# Altium PCB RiskChemi_Sensors.PcbDoc
Units mil, origin at the board's own origin, x right, y up, seen from the top; angles counter-clockwise.
Board outline 6000 x 4000 mil, 2 copper layers (Top Layer, Bottom Layer); 90 components, 57 nets, 307 pads, 573 vias.
Unrouted connection lines stored in the file: 3.
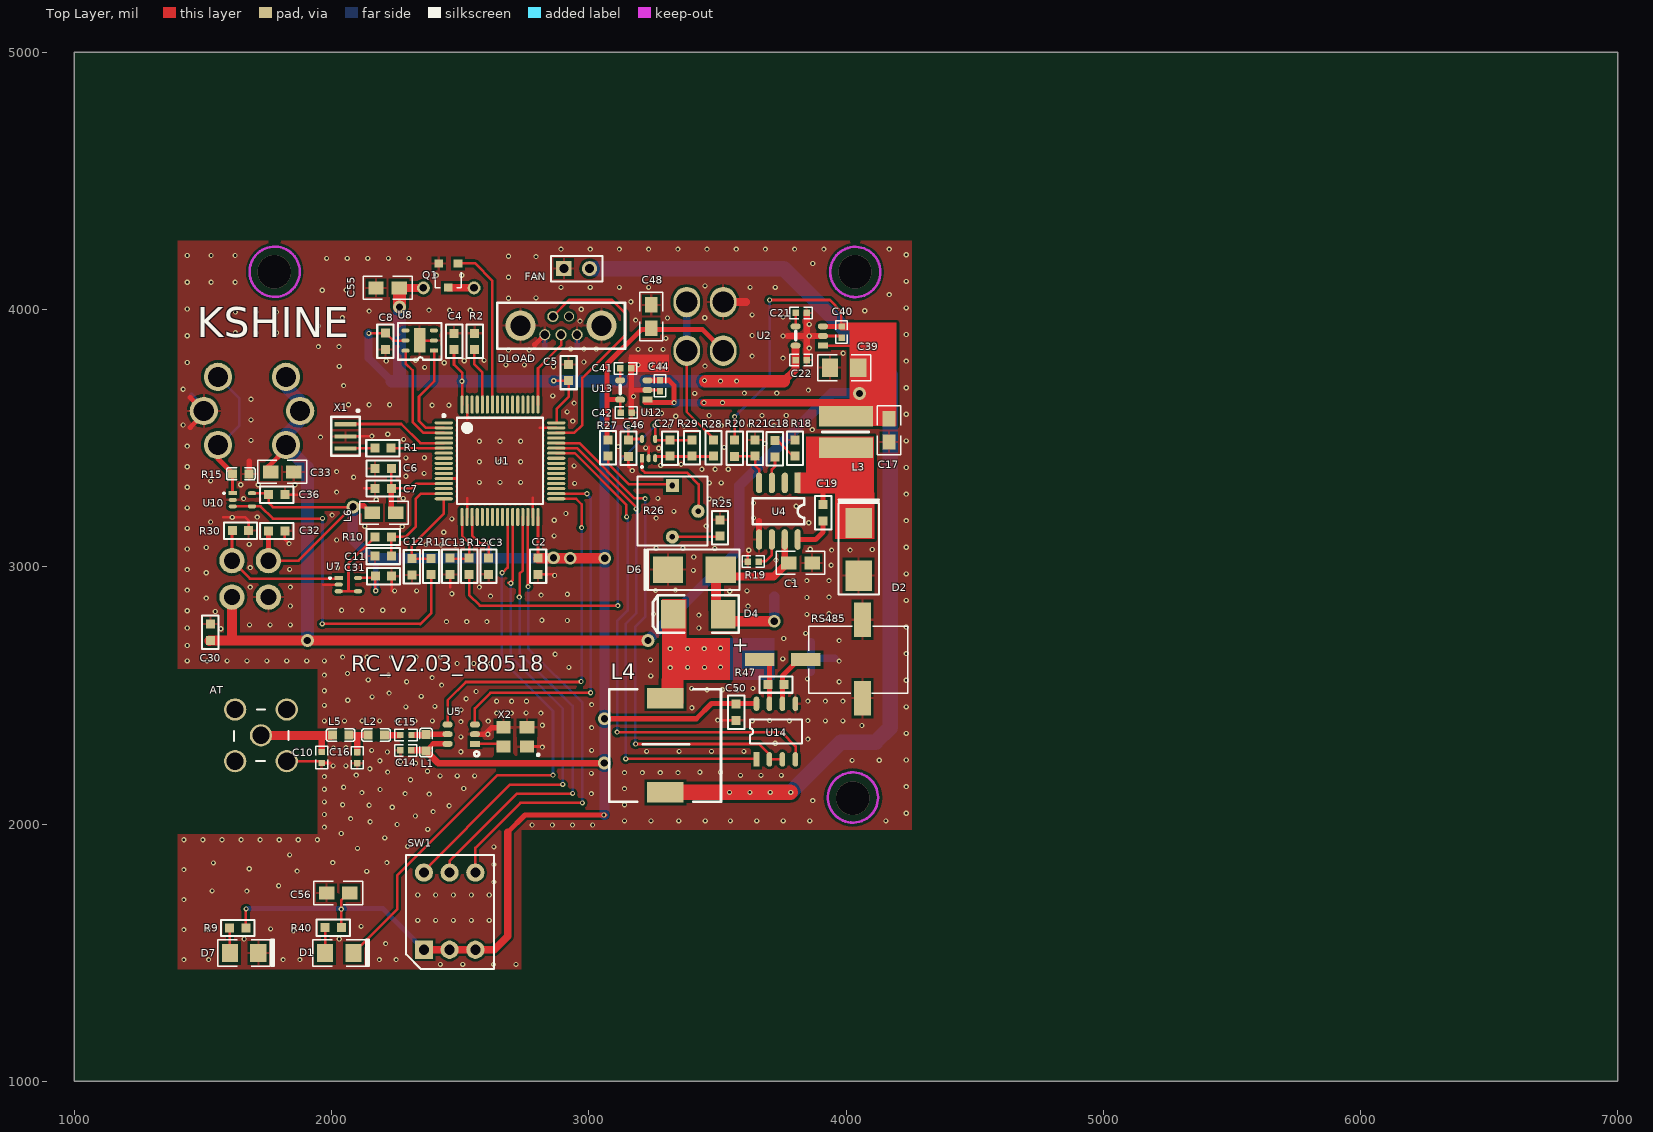
[diagram p0: Top Layer view]
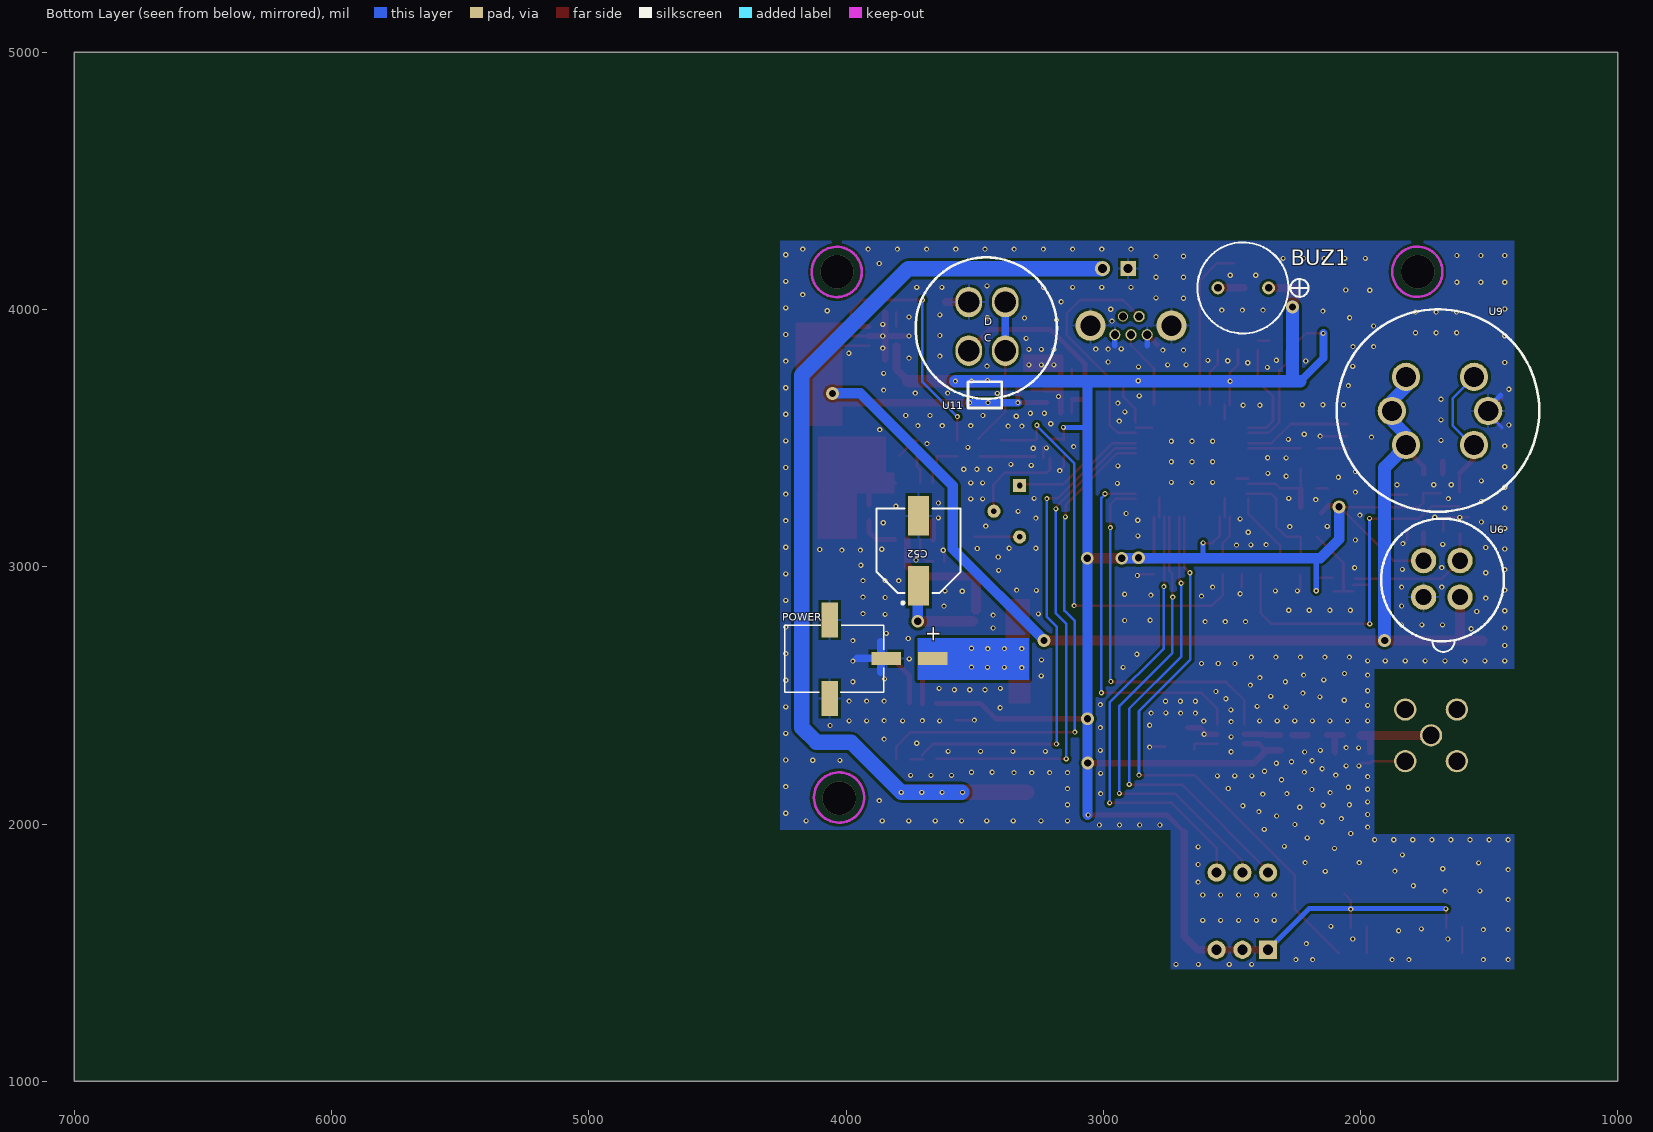
[diagram p1: Bottom Layer view, seen from below]

## Layer stack, top to bottom
Top Solder: solder mask 0.4, Solder Resist, Dk 3.5
Top Layer: signal copper 1.4
Dielectric 1: dielectric 12.6, FR-4, Dk 4.8
Bottom Layer: signal copper 1.4
Bottom Solder: solder mask 0.4, Solder Resist, Dk 3.5

## Board outline
1000,1000 7000,1000 7000,5000 1000,5000

## Design rules (kind name [scope] priority, off if disabled: settings)
Clearance Clearance_5 [InNamedPolygon('GND_L02_P-001')] p1: gap=10
Clearance Clearance_4 [InNamedPolygon('GND_L02_P-001')] p2: gap=10
Clearance Clearance_3 [InNamedPolygon('GND_L02_P-001')] p3: gap=10
Clearance Clearance_2 [InNamedPolygon('Top Layer-DGND')] p4: gap=10
Clearance Clearance_1 [InNamedPolygon('GND_L02_P-001')] p5: gap=10
Clearance [All] p6: gap=3
ComponentClearance [All] p1: gap=0 collisioncheckmode=3 verticalgap=0 showdistances=FALSE
PolygonConnect PolygonConnect_1 [IsVia] p1: connectstyle=Direct reliefconductorwidth=10 reliefentries=2 polygonreliefangle="90 Angle" airgapwidth=10
PolygonConnect [All] p2: connectstyle=Relief reliefconductorwidth=10 reliefentries=4 polygonreliefangle="90 Angle" airgapwidth=10
RoutingVias [All] p1: holewidth=28 width=50 viastyle="Through Hole" minholewidth=28 minwidth=50 maxholewidth=28 maxwidth=50
SilkToSilkClearance [All] p1 off: silktosilkclearance=10
SilkToSolderMaskClearance [IsPad] p1 off: minsilkscreentomaskgap=10 clearancetoexposedcopper=TRUE
SolderMaskExpansion [All] p1: expansion=4
Width [All] p1: maxlimit=100 minlimit=10 preferedwidth=10
27 further rules are at their usual default settings.

## Components (designator, comment, footprint, x,y, rotation, side; value= is the part's Value field where it differs from the comment)
AT "SMA" SMA 1826,2445 r270 top
BUZ1 "BUZZER" BUZ0905 2455,4084 r180 bottom
C1 "10uF" 0805 3778,3015 r0 top
C2 "100nF" 0603 2799,3063 r0 top
C3 "100nF" 0603 2606,3063 r0 top
C4 "100nF" 0603 2481,3815 r180 top
C5 "100nF" 0603 2926,3694 r180 top
C6 "100nF" 0603 2262,3386 r270 top
C7 "1uF" 0603 2262,3309 r270 top
C8 "100nF" 0603 2205,3938 r0 top
C10 "NULL" 0402 1958,2365 r0 top
C11 "100nF" 0603 2140,3037 r90 top
C12 "100nF" 0603 2308,3061 r0 top
C13 "100nF" 0603 2457,3063 r0 top
C14 "100nF" 0402 2395,2290 r270 top
C15 "82pF" 0402 2183,2342 r90 top
C16 "3.9pF" 0402 2096,2364 r0 top
C17 "22uF" 0805 4167,3575 r270 top
C18 "150pF" 0603 3719,3520 r0 top
C19 "100nF" 0603 3907,3271 r0 top
C21 "NULL" 0402 3719,3983 r90 top
C22 "1uF" 0402 3719,3799 r90 top
C27 "1uF" 0603 3320,3399.95 r180 top
C30 "1uF" 0603 1533,2684 r180 top
C31 "100nF" 0603 2141,2959 r90 top
C32 "100nF" 0603 1726,3135 r90 top
C33 "10uF" 0805 1763,3369 r0 top
C36 "100nF" 0603 1726,3276 r90 top
C39 "22uF" 1206 4048,3774 r180 top
C40 "100nF" 0402 3979,4019 r0 top
C41 "22nF" 0402 3037,3767 r90 top
C42 "1uF" 0402 3039,3595 r90 top
C44 "100nF" 0402 3273,3810 r0 top
C46 "100nF" 0603 3150,3522 r0 top
C48 "10uF" 0805 3243,3928 r90 top
C50 "100nF" 0603 3569,2496 r0 top
C52 "47uF" cap_pol_8*10.2 3718,3062 r90 bottom
C55 "10uF" 0805 2263,4084 r180 top
C56 "10uF" 0805 2071,1732 r180 top
D1 "LED_STATUS" 1206_LED 2028,1502 r0 top
D2 "B290-13-F" B290 4049,3170 r270 top
D4 "1N4007" 6032_pol 3428,2814 r180 top
D6 "SMAJ36CA" B290 3308,2989 r0 top
D7 "LED_POWER" 1206_LED 1658,1502 r0 top
DLOAD "USB Connector" Mini_USB 2892,3902 r90 top
FAN "Header 2" HDR1X2 2903,4159 r0 top
L1 "100nH" 0603C 2368,2318 r0 top
L2 "8.2nH" 0603C 2175,2345 r270 top
L3 "15uH" "4*4 Inductor" 3992,3524 r180 top
L4 "22uH" 10*10Inductor 3298,2123 r0 top
L5 "0R" 0603C 2037,2345 r270 top
L6 "10uH" 0805 2249,3210 r180 top
POWER "Header 3" KR_1X2H 4083,2650 r90 bottom
Q1 "2N7002" 2N7002 2456,4133 r180 top
R1 "100R" 0603 2261,3465 r270 top
R2 "10K" 0603 2561,3815 r180 top
R9 "510R" 0603 1697,1600 r270 top
R10 "1M" 0603 2262,3120 r270 top
R11 "1M" 0603 2383,3062 r0 top
R12 "1M" 0603 2531,3063 r0 top
R15 "Res1" 0603C 1646,3362 r90 top
R18 "100k" 0603 3806,3400 r180 top
R19 "200K" 0402 3746,3024 r270 top
R20 "210K" 0603 3563,3522 r0 top
R21 "40.2K" 0603 3650,3400 r180 top
R25 "5K" 0603 3514,3090 r180 top
R26 "3362P" res_adj 3325,3316 r0 top
R27 "5K" 0603 3071,3523 r0 top
R28 "1K" 0603 3489,3401 r180 top
R29 "100K" 0603 3397,3523 r0 top
R30 "10K" 0603 1585,3136 r90 top
R40 "510" 0603 2068,1601 r270 top
R47 "120" 0603 3789,2546 r270 top
RS485 "Header 3" KR_1X2H 4084,2632 r270 top
SW1 "HRO韩国韩荣拨码开关" SW_6P_HRO 2359,1511 r90 top
U1 "STM32F103R8T6" LQFP64_N 2655,3412 r0 top
U2 "RT9013-33GB" SOT-23-5 3863,3899 r90 top
U4 "MP2565DN" so-8 3812,3326 r270 top
U5 "CMT2119A" SOT23-6 2510,2351 r90 top
U6 "TGS2602" "Gas Sensor TGS2602 Slot" 1613,2882 r0 bottom
U7 "LMV321SQ3T2G" SC-70-5 2028,2956 r0 top
U8 "SHT20" SHT20 2398,3840 r180 top
U9 "Gas Sensor" "Gas Sensor 2M010 Slot" 1823,3738 r180 bottom
U10 "LMV321SQ3T2G" SC-70-5 1616,3286 r0 top
U11 "WS101" Gas_Sensor_WS101_Slot 3452.45,3921 r180 bottom
U12 "LMV321SQ3T2G" SC-70-5 3207,3422 r90 top
U13 "RT9193-30" SOT-23-5 3181,3689 r90 top
U14 "SP3485" SO-8N 3652,2251 r90 top
X1 "8M smd" 8Mhz_XTAL 2054,3554 r270 top
X2 "XTAL_Negative" XTAL3225 2669,2376 r0 top

## Footprints (in the part's own frame and the unit in brackets; to place one, negate y for a bottom-side part, rotate by r counter-clockwise, add the part's x,y. Pads: shape width x height; smd on the part's side, far side on the other; paste and mask are expansions set on the pad)
2N7002 [mm]
  rect 0.85x0.8 smd: 1(0.047,1.221) 2(-0.903,-1.179) 3(0.997,-1.179)
  silkscreen extent -1.23,-0.28 1.32,1.22
"4*4 Inductor" [mm]
  rect 5.3x2 smd: 1(-0.203,-1.548) 2(-0.203,1.552)
  silkscreen extent -2.46,0 2.13,0
8Mhz_XTAL [mm]
  rect 0.4x2.2 smd: 1(0,0) 2(1.2,0) 3(2.4,0)
  silkscreen extent -1.45,-1.39 3.13,1.4
10*10Inductor [mm]
  rect 3.6x2 smd: 1(0,0) 2(0,9.3)
  silkscreen extent -5.55,-0.92 5.49,10.19
0402 [mil]
  rect 25x25 smd: 1(3.98,-127.99) 2(3.98,-84.98)
  silkscreen extent -19,-150 26,-63
0603 [mil]
  rect 35x35 smd: 1(4.25,-92.76) 2(4.25,-29.76)
  silkscreen extent -27,-126 36,4
0603C [mil]
  rect 35x35 smd: 1(-0.83,30.88) 2(-0.83,-34.12)
  silkscreen extent -24,-57 23,54
0805 [mil]
  rect 60x50 smd: 1(90,0) 2(0,0)
  silkscreen extent -50,-45 140,45
1206 [mm]
  rect 1.6x1.8 smd: 1(0,0) 2(2.8,0)
  silkscreen extent -1.2,-1.3 4,1.3
1206_LED [mm]
  rect 1.6x1.8 smd: 1(-1.344,-0.081) 2(1.456,-0.081)
  silkscreen extent -2.54,-1.38 2.98,1.22
6032_pol [mm]
  rect 2.4x2.8 smd: 1(2.538,-0.041) 2(-2.422,-0.041)
  silkscreen extent -3.95,-1.89 4.53,1.81
B290 [mm]
  rect 3x2.6 smd: 1(5.2,0) 2(0,0)
  silkscreen extent -2.34,-2 7.06,2
BUZ0905 [mm] "Buzzer"
  round 1.27 hole 0.75: 1(2.485,0.002) 2(-2.515,0.002)
  silkscreen extent -4.55,-4.5 6.43,4.5
cap_pol_8*10.2 [mm]
  rect 3.9x2.05 smd: 1(-3.443,-0.001) 2(3.457,-0.001)
  silkscreen extent -5.27,-4.15 4.16,4.15
"Gas Sensor 2M010 Slot" [mm]
  round 2.8 hole 2: 1(0,0) 2(-1.391,-3.36) 3(0,-6.719) 4(6.719,-6.719) 5(8.109,-3.36) 6(6.719,0)
  silkscreen extent -6.84,-13.32 13.16,6.68
"Gas Sensor TGS2602 Slot" [mm]
  round 2.5 hole 1.6: 1(0,0) 2(0,-3.6) 3(3.6,-3.6) 4(3.6,0)
  silkscreen extent -4.33,-7.76 7.8,5.42
Gas_Sensor_WS101_Slot [mm]
  oval 2.6x3 hole 2.1: 1(-1.783,2.742) 2(-1.783,-2.058) 3(1.817,-2.058) 4(1.817,2.742)
  silkscreen extent -7.04,-7.72 6.93,7.16
HDR1X2 [mm] "Connector; Header; 2 Position"
  rect 1.5x1.5 hole 0.9: 1(0,0)
  round 1.5 hole 0.9: 2(2.54,0)
  silkscreen extent -1.27,-1.27 3.81,1.27
KR_1X2H [mm]
  rect 1.27x2.92 smd: 1(-0.181,-10.66) 2(-0.181,-6.088)
  rect 3.43x1.65 smd: 3(-4.118,-0.5) 3(3.629,-0.5)
  silkscreen extent -3.48,-5.83 3.12,3.95
LQFP64_N [mm] "Thin QFP, 64-Leads, Body 10x10mm, Pitch 0.5mm, IPC Medium Density"
  oval 1.8x0.3 smd: 1(-5.55,3.75) 2(-5.55,3.25) 3(-5.55,2.75) 4(-5.55,2.25) 5(-5.55,1.75) 6(-5.55,1.25) 7(-5.55,0.75) 8(-5.55,0.25) 9(-5.55,-0.25) 10(-5.55,-0.75) 11(-5.55,-1.25) 12(-5.55,-1.75) 13(-5.55,-2.25) 14(-5.55,-2.75) 15(-5.55,-3.25) 16(-5.55,-3.75) 33(5.55,-3.75) 34(5.55,-3.25) 35(5.55,-2.75) 36(5.55,-2.25) 37(5.55,-1.75) 38(5.55,-1.25) 39(5.55,-0.75) 40(5.55,-0.25) 41(5.55,0.25) 42(5.55,0.75) 43(5.55,1.25) 44(5.55,1.75) 45(5.55,2.25) 46(5.55,2.75) 47(5.55,3.25) 48(5.55,3.75)
  oval 0.3x1.8 smd: 17(-3.75,-5.55) 18(-3.25,-5.55) 19(-2.75,-5.55) 20(-2.25,-5.55) 21(-1.75,-5.55) 22(-1.25,-5.55) 23(-0.75,-5.55) 24(-0.25,-5.55) 25(0.25,-5.55) 26(0.75,-5.55) 27(1.25,-5.55) 28(1.75,-5.55) 29(2.25,-5.55) 30(2.75,-5.55) 31(3.25,-5.55) 32(3.75,-5.55) 49(3.75,5.55) 50(3.25,5.55) 51(2.75,5.55) 52(2.25,5.55) 53(1.75,5.55) 54(1.25,5.55) 55(0.75,5.55) 56(0.25,5.55) 57(-0.25,5.55) 58(-0.75,5.55) 59(-1.25,5.55) 60(-1.75,5.55) 61(-2.25,5.55) 62(-2.75,5.55) 63(-3.25,5.55) 64(-3.75,5.55)
  silkscreen extent -5.67,-4.25 4.25,4.57, body extent -5,-5 5,5, height 1.6
Mini_USB [mm] "180 degree"
  round 1.1 hole 0.8: 1(0,-1.6) 3(0,0) 4(1.8,0.8) 5(0,1.6)
  round 1 hole 0.8: 2(1.8,-0.8)
  round 3 hole 2: 6(0.9,4) 7(0.9,-4)
  silkscreen extent -1.39,-6.32 3.15,6.3
res_adj [mm]
  rect 1.3x1.3 hole 0.55: 1(0,0)
  round 1.3 hole 0.55: 2(2.54,-2.54) 3(0,-5.08)
  silkscreen extent -3.44,-5.95 3.45,0.9
SC-70-5 [mm]
  rect 0.8x0.4 smd: 1(0,0)
  oval 0.8x0.4 smd: 2(0,-0.65) 3(0,-1.3) 4(1.9,-1.3) 5(1.9,0)
  silkscreen extent -0.91,-0.05 -0.81,0.05
SHT20 [mm]
  rect 0.8x0.4 smd: 1(0,0)
  oval 0.8x0.4 smd: 2(0,-1) 3(0,-2) 4(2.8,-2) 5(2.8,-1) 6(2.8,0)
  rect 1.1x2.4 smd: 2(1.402,-1.019)
  silkscreen extent -0.75,-2.72 3.53,0.89
SMA [mm]
  round 2.2 hole 1.7: 1(2.55,-2.55) 2(0,0) 2(0,-5.1) 2(5.1,0) 2(5.1,-5.1)
  silkscreen extent -0.03,-5.21 5.08,0.18
so-8 [mil]
  rect 80x24 smd: 1(0,0)
  oval 80x24 smd: 2(0,-50) 3(0,-100) 4(0,-150) 5(220,-150) 6(220,-100) 7(220,-50) 8(220,0)
  silkscreen extent 60,-175 160,25
SO-8N [mm]
  rect 1.44x0.55 smd: 1(0,0)
  oval 1.44x0.55 smd: 2(0,-1.28) 3(0,-2.56) 4(0,-3.84) 5(5.5,-3.84) 6(5.5,-2.56) 7(5.5,-1.28) 8(5.5,0)
  silkscreen extent 1.55,-4.48 3.95,0.64
SOT23-6 [mm]
  rect 0.6x1 smd: 1(-0.998,-1.204)
  oval 0.6x1 smd: 2(-0.048,-1.204) 3(0.902,-1.204) 4(0.902,1.496) 5(-0.048,1.496) 6(-0.998,1.496)
  silkscreen extent -2.23,-1.62 -1.76,-1.14, body extent -1.5,-1.3 1.4,1.5, height 1.2
SOT-23-5 [mm]
  rect 0.6x1 smd: 1(-0.995,-1.201)
  oval 0.6x1 smd: 2(-0.045,-1.201) 3(0.905,-1.201) 4(0.905,1.499) 5(-0.995,1.499)
  silkscreen extent -0.4,1.5 0.4,1.5, body extent -1.5,-1.3 1.4,1.5, height 1.2
SW_6P_HRO [mm]
  rect 1.8x1.8 hole 1: 1(0,0)
  round 1.8 hole 1: 2(0,-2.54) 3(0,-5.08) 4(7.62,-5.08) 5(7.62,-2.54) 6(7.62,0)
  silkscreen extent -1.89,-6.93 9.34,1.74
XTAL3225 [mm]
  rect 1.4x1.2 smd: 1(0,-1.9) 2(2.3,-1.9) 4(0,0)
  rect 1.5x1.2 smd: 3(2.3,0)
  silkscreen extent 3.32,-2.82 3.52,-2.62

## Part data
AT: library part SMB, "SMB Straight Connector"
BUZ1: "Buzzer"
C1 C17: library part Cap, "Capacitor,50V"
C2 C3 C4 C5 C6 C7 C8 C10 C11 C12 C13 C14 C15 C16 C18 C19 C21 C22 C27 C30 C31 C32 C33 C36 C39 C40 C41 C42 C44 C46 C48 C50 C55 C56: library part Cap, "Capacitor"
C52: library part "Cap Pol1", "Polarized Capacitor (Radial)"
D1 D7: library part LED0, "Typical INFRARED GaAs LED"
D2: library part Diode, "Default Diode"
D4 D6: library part "Diode 1N4007", "1 Amp General Purpose Rectifier"
DLOAD: library part Component_1
FAN: "Header, 2-Pin"
L1 L2 L5 L6: library part Inductor, "Inductor"
L3 L4: library part Inductor, "Inductor, 1A"
POWER RS485: "Header, 3-Pin"
Q1: library part N-MOSFET
R1 R2 R9 R10 R11 R12 R18 R19 R20 R21 R25 R27 R28 R29 R30 R40 R47: library part Res1, "Resistor"
R15: "Resistor"
R26: library part res_adj
SW1: library part SW_6P
U1: "STM32 ARM-based 32-bit MCU with 64 Kbytes Flash, 64-pin LQFP, Industrial Temperature"
U2 U13: library part RT9193
U4: library part MP1584, "DCDC 4.5V~28V input 1.8V ~5V output low power"
U6: "VOC sensor"
U11: library part "Gas Sensor_WS101"

## Via types
v1: diameter 20, hole 10, Top Layer to Bottom Layer, tented both sides, 508 vias
v2: diameter 20, hole 10, Top Layer to Bottom Layer, 51 vias
v3: diameter 50, hole 28, Top Layer to Bottom Layer, 11 vias
v4: diameter 129.92, hole 129.92, Top Layer to Bottom Layer, 3 vias

## Nets (pads, with @x,y where several pads share a name; then routed paths per layer and width w, separated by ;. In a path a pad name is that pad's centre, name@x,y a point inside that pad or via, vN(x,y) a via of type N, cw(c..) or ccw(c..) an arc to the next point about the centre after c; other vN are vias at no path point)
24V: C1.2 C52.1 D4.2 D6.1 U4.7 | length 845.6
  Top Layer w10: D6.1@3494.72,2962 D6.1@3494.72,2990
  Top Layer w25: C1.2@3762,3002 U4.7
  Top Layer w30: D6.1@3494.72,2962 3719,2962 C1.2@3761,3004
  Top Layer w40: D4.2@3494.72,2831.72 D6.1@3494.72,2962 ; D4.2@3506,2788.63 v3@3709.63,2788.63
  Bottom Layer w40: v3(3721,2788) C52.1@3721,2884
A5V0: C17.2 C30.2 C33.2 C39.1 C40.2 C44.2 L3.1 R20.2 U2.1 U2.3 U6.1 U9.1 U9.2 U9.3 U13.1 U13.3 | length 6695.8
  Top Layer w10: R20.2 v2@3567.25,3585.25 ; v2(3703,4037) 3937,4037 3981,3993 C40.2@3981,3934.02 ; U2.3@3910,3935 U2.3@3910.98,3934.02 ; U2.1 4021.83,3859.83 4022,3860 ; C40.2@3981,3931 C40.2@3981,3934.02 ; C40.2 C40.2@3981,3934.02
  Top Layer w20: C33.2@1754,3360 1754,3389 1823,3458 U9.3 ; 3218,3638 v2(3332,3638) 3332,3704 3311,3725 U13.3@3228,3725 ; U2.3@3910.98,3934.02 C40.2@3981,3934.02
  Top Layer w30: v2(3448,3638) v2(3520,3638) 4029,3638 ; C40.2 4031.02,3934.02
  Top Layer w40: C30.2@1526,2712 1527,2713 v3(3230,2713) ; 1613,2719 U6.1
  Bottom Layer w10: U9.2@1877.75,3567.75 U9.2@1877.75,3645.25 ; v2@3571,3587 3703,3719 v2@3703,4036
  Bottom Layer w30: v2@3331,3638 v2(3332,3638) v2(3448,3638) v2(3520,3638)
  Bottom Layer w40: v3@3232,2716 3585,3069 3585,3315 3944,3674 v3(4053,3674)
  Bottom Layer w50: U9.1@1816,3707 U9.2@1877.75,3645.25 ; U9.3@1822,3470 1906,3386 v3(1906,2713) ; U9.3 1823,3513 U9.2@1877.75,3567.75
  other v2: 3567,3584
ADC_IN1: R10.1 U7.3 U7.4 | length 321.4
  Top Layer w10: U7.3 U7.4 ; 2066,2906 2066,3008 ; 2066,3014 R10.1@2168.24,3116.24
ADC_IN2: R11.1 U10.3 U10.4 | length 1366.4
  Top Layer w10: U10.3 U10.4 1724.18,3234.82 1772,3187 v2@1960,3187 ; v2(1964,2778) 2344,2778 2345,2777 2388,2820 R11.1@2388,2972
  Bottom Layer w10: v2@1964,3187 v2(1965,3188) v2@1965,2781
ADC_IN3: C27.1 R12.1 R29.2 U12.4 | length 1622.6
  Top Layer w10: R12.1 2535.25,2890.75 2577,2849 v2@3114,2849 ; U12.4 v2@3258.18,3548.82 ; U12.4@3259.76,3491.76 R29.2@3395.76,3491.76
  Bottom Layer w10: v2(3113,2849) 3113,3403 v2@3258,3548
  other v2: 3258,3550
BUZZER: Q1.2 U1.58 | length 641.9
  Top Layer w10: Q1.2@2493,4180 2557,4180 2625.47,4111.53 U1.58
CLK: U1.33 U5.4 | length 1440.2
  Top Layer w10: U5.4 2451.1,2481.1 2522,2552 v2@2971,2552 ; U1.33 2950.64,3264.36 2972,3243 v2(2972,3152)
  Bottom Layer w10: v2@2972,2556 v2@2972,3154
  other v2: 2970,2554
D3V0: C42.2 C48.2 R27.2 U11.2 U13.5 | length 933.1
  Top Layer w10: C42.2@3121.98,3598.98 U13.5
  Top Layer w20: R27.2@3071,3493 3071,3788 3206,3923 3441,3923 U11.2@3522,3842 ; 3075.17,3649.83 U13.5
D3V3: BUZ1.1 C2.2 C3.2 C4.2 C5.2 C8.2 C14.2 C22.2 C31.2 C32.2 C36.2 C46.2 C50.2 C55.2 C56.2 L1.2 L6.1 R9.2 R40.2 SW1.1 SW1.2 SW1.3 U1.19 U1.32 U1.48 U1.64 U2.5 U5.6 U6.3 U7.5 U8.5 U10.5 U12.5 U14.8 | length 11495.3
  Top Layer w10: R9.2 v2@1667.24,1671.76 ; U10.5 C36.2@1756,3286 ; U6.3 1871.73,3023.73 2080,3232 1772,3232 1756.76,3247.24 C36.2@1756.76,3286.25 ; v2(2038,1669) 2038,1704 C56.2@2063,1729 ; R40.2 v2@2038.24,1668.24 ; U7.5@2107.8,2957 C31.2@2170.76,2957 ; v2@2144.76,3908.24 C8.2 ; L6.1@2152,3210 L6.1 ; v2@2170.76,2904.76 C31.2@2170.76,2966.25 ; C8.2@2220,3900 2241,3879 U8.5@2286,3879 ; C4.2@2476,3844 2476,3786 2507.36,3754.64 U1.64 ; U1.19 2546.73,3122.27 2577,3092 v2@2612,3092 ; C3.2@2611,3033 v2@2611,3091 ; C2.2@2802.64,3033 C2.2@2802.64,3033.24 ; U1.32 C2.2@2802.64,3033.24 ; C2.2 C2.2@2802.64,3033.24 ; v2@2866.76,3723.76 C5.2 2921.75,3660.75 2876,3615 U1.48@2876,3561 ; C46.2 v2@3154.25,3546.75 ; C46.2@3159.2,3496.8 U12.5
  Top Layer w20: U6.3 C32.2@1754.73,3133 ; v3@2084,3237 2125,3237 L6.1@2152,3210 ; L1.2@2369,2285 2395.71,2311.71 U5.6@2453,2311.71 ; 2685,1968 2752,2035 v2@3063,2035 ; v3(3061,2409) 3418,2409 3477,2468 U14.8@3650,2468
  Top Layer w25: C14.2 L1.2@2364.02,2286.02 ; L1.2 2414.05,2237 v3@3058,2237
  Top Layer w30: C55.2@2278.08,4084.08 BUZ1.1 ; SW1.1 SW1.2 SW1.3 2632,1511 2685,1564 2685,1968 ; 3757,3721 3803.98,3767.98 U2.5@3803.98,3857
  Top Layer w40: C2.2@2802.64,3033 v3(3062,3033)
  Top Layer w50: v3(2264,4010) C55.2@2264,4079 ; v2@3454,3721 3757,3721
  Bottom Layer w10: v2(2507,3721) 2507,3725 v2@2508,3726
  Bottom Layer w20: v2@1672,1671 2199,1671 SW1.1 ; v2(2172,2907) 2172,3027 ; 2612,3037 v2(2612,3093) ; 3082,3542 v2(3155,3542)
  Bottom Layer w30: v2@2144,3909 2144,3811 2234,3721
  Bottom Layer w40: v3(2083,3233) 2083,3107 2156.5,3033.5 2157,3034 2158,3033 v3(2928,3033) ; v2@3061,2036 3061,3714
  Bottom Layer w50: 2234,3721 2264,3721 ; v3@2264,4011 v3(2264,4010) 2264,3721 ; v2@3574,3721 v2(2507,3721) 2264,3721
  other v2: 1668,1670 3059,2035 3512,3722 3575,3722 2864,3723 3450,3724 2145,3907
  other v3: 3060,2237 2863,3035
DATA: U1.34 U5.3 | length 1436.3
  Top Layer w10: U5.3 2557.4,2449.4 2618,2510 v2@3006,2510 ; U1.34 v2(2993,3284)
  Bottom Layer w10: v2@2992,3283 3007,3268 v2@3007,2509
  other v2: 3007,2510
DGND: AT.2 C1.1 C2.1 C3.1 C4.1 C5.1 C6.1 C7.1 C8.1 C10.1 C11.2 C12.1 C13.1 C14.1 C16.1 C17.1 C21.1 C22.1 C30.1 C31.1 C32.1 C33.1 C36.1 C39.2 C40.1 C41.1 C42.1 C44.1 C46.1 C48.1 C50.1 C52.2 C55.1 C56.1 D2.1 D6.2 D7.2 DLOAD.1 DLOAD.5 DLOAD.6 DLOAD.7 FAN.1 POWER.2 POWER.3 Q1.3 R2.1 R15.2 R18.1 R19.1 R21.1 R25.1 R30.1 RS485.3 U1.12 U1.18 U1.31 U1.47 U1.63 U2.2 U4.5 U5.2 U6.4 U7.2 U8.2 U9.5 U10.2 U11.1 U12.2 U13.2 U14.5 X1.2 X2.2 X2.3 X2.4 | length 3154.7
  Top Layer w10: U9.5@1503.74,3594.74 U9.5 ; 1580,3193 1664,3193 1677.76,3179.24 R30.1 ; C32.1 1818.76,3105.24 v1@1832,3092 ; C36.1 1879.25,3280.25 ; AT.2@1826,2244.21 C10.1@1958.79,2244.21 ; C10.1 1994.99,2237.01 ; 1967.41,2930.41 U7.2 ; X1.2 v1@2157.76,3506.76 ; 2127.75,3304.75 C7.1 ; 2233.76,2907.24 C31.1@2233.76,2966.25 ; U8.2@2355.63,3879.37 U8.2@2398,3879.37 ; U1.12 2482.1,3343.1 ; 2461.25,2919.75 C13.1 ; U1.18 2527.05,3265.95 ; 2527.05,3572.95 U1.63 ; X2.2 v1@2824.8,2301.2 ; U1.31 2782.95,3268.95 ; C2.1 v1@2871.76,2970.24 ; 2808.95,3539.95 U1.47 ; C46.1 3154.25,3389.75 v1@3169,3375 ; U13.2 C44.1@3277.23,3687.23 ; U12.2 3232.59,3467 ; v1@3500.24,2403.24 C50.1 ; R19.1 v1@3618.01,3066.99 ; U2.2 C40.1@3983.77,3897.23
  Top Layer w20: 1451,3542 U9.5@1503.74,3594.74 ; 1451,3658.46 U9.5 ; R15.2 1680.12,3411.12 ; U5.2 2597.11,2349.11 2622,2374 X2.4@2672,2374 ; 2790,3862.99 DLOAD.5 ; C42.1@3164.99,3599.01 3164.99,3687.23 ; 3164.99,3811 C41.1 3164.99,3687.23 ; U13.2 3164.99,3687.23
  Top Layer w22: U4.5 3662,3179
  Top Layer w25: 3773.77,3897.23 3846.99,3897.23 ; C22.1@3846.99,3804 3846.99,3897.23 ; C21.1 3846.99,3897.23 ; U2.2 3846.99,3897.23
  Top Layer w30: U11.1 3610.97,4028.97
  Bottom Layer w10: 1450,3541 1503.74,3594.74 U9.5 U9.5@1503.74,3619.26
  Bottom Layer w20: 1456,3667 U9.5@1503.74,3619.26 ; 2829.01,3858.99 DLOAD.5 ; 2954.99,3859.01 DLOAD.1
  Bottom Layer w30: 3864,2591 3864,2708 ; POWER.2@3895,2644 3956,2644
  other v1: 2423,1454 2510,1454 2630,1454 2717,1454 1426,1473 1522,1473 1812,1473 1877,1473 2186,1473 2251,1473 2210,1535 1660,1553 2030,1553 1852,1585 1426,1589.5 1522,1589.5 1763,1592 2115,1602 2335,1625 2404.5,1625 2474,1625 2543.5,1625 2613,1625 1426,1706 2335,1724 2404.5,1724 2474,1724 2543.5,1724 2613,1724 1671,1739 1536,1740 1794,1760 2631,1774 2137,1816 1866,1817 1426,1822.5 1680,1826 2631,1842.5 1541,1849 2005,1850 2215,1850 1837,1880 2101,1905 2631,1911 2296,1913 1426,1939 1500.14,1939 1574.29,1939 1648.43,1939 1722.57,1939 1796.71,1939 1870.86,1939 1945,1939 2207,1946 2038,1963 2374,1979 1972,1988 2780,1996 2858.33,1996 2936.67,1996 3015,1996 2255,1998 2150,2009 3139,2012 3241.86,2012 3349.71,2012 3452.57,2012 3550.43,2012 3653.29,2012 3756.14,2012 3859,2012 4155,2012 2074,2021 2326,2031 1972,2037 4234,2042 2395,2048 2236,2065 2457,2071 2146,2073 2043,2075 3139,2074.67 1972,2086 3871,2091 2380,2116 2286,2118 3010,2118 2118,2122 2189,2134 1972,2135 3139,2137.33 2514,2138 2047,2143 4234,2145.38 2307,2172 1972,2184 2422,2187 2489,2187 2556,2187 3590,2189 3669.5,2189 3749,2189 2096,2190 3010,2197 3139,2200 3208.33,2200 3277.67,2200 3347,2200 3432,2201 3512,2201 2218,2202 2373,2205 2149,2215 2006,2226 2056,2226 2327,2236 2268,2242 2188,2246 4024,2247 4129,2248 4234,2248.76 2217,2280 2503,2281 3225,2282 3351,2282 3477,2282 3603,2282 2156,2286 3011,2286 2007,2296 2056,2297 2820,2299 3725,2314 3852,2330 2503,2338.5 2608,2349 4234,2352.14 3011,2375 4062,2383 2820,2384 2503,2398 2609,2400 1972,2401 2050.33,2401 2118.67,2401 2187,2401 2255.33,2401 2323.67,2401 2392,2401 3636,2401 3780,2401 3920,2401 3988,2401 3703,2402 3852,2402 3501,2404 2642,2431 2699.33,2431 2814,2431 2756.67,2432 2504,2443.5 3401,2452 2289,2455 4234,2455.52 2402,2457 1972,2461 3011,2464 2642,2477 2700,2477 2758,2477 3852,2478 3920,2478 3988,2478 2063,2481 2523,2487 2158,2494 2349,2496 2224,2509 2562,2515 1972,2518 3459.5,2522 3519,2522 3578.5,2522 3400,2527 3638,2527 2428,2540 2292,2553 3973,2553 4234,2558.9 2143,2560 3850,2564 2391,2569 3241,2576 1972,2579 2221,2579 2062,2585 2923,2609 2488,2624 2553,2624 2618,2624 3973,2633 1439,2634 1516.43,2634 1593.86,2634 1671.29,2634 1748.71,2634 1826.14,2634 1903.57,2634 1972,2634 3240,2638 3754,2642 2043,2649 2138.25,2649 2233.5,2649 2328.75,2649 2424,2649 2869,2660 4234,2662.29 1439,2694 3973,2713 3758,2721 3843,2741 1570,2759 1439,2762 3428,2762 4234,2765.67 1681,2774 1761,2774 1840,2774 2447,2787 2525.5,2787 2604,2787 2917,2791 2818,2792 3428,2812 3848,2815 3252,2817 3934,2818 1548,2826 1439,2829 2039,2831 2119,2831 2199,2831 2279,2831 3619,2847 1840,2847.5 4234,2869.05 1513,2878 3848,2880.5 3934,2882 2618,2886 2815,2890 2917,2893 2468,2895 3548,2905 2245,2906 2331,2906 3615,2906 3260,2908 1439,2909 3337,2909 1684,2921 1840,2921 2575,2921 3795,2946 3848,2946 3934,2946 2867,2966 4234,2972.43 1513,2976.5 3407,2986 1439,2989 1837,2990 2023,2996 1684,2997 3942,3006 3728,3026 3408,3038 3622,3064 3944,3065 4016,3065 4102,3067 3861,3068 1439,3069 3490,3071 3262,3072 3366,3072 1513,3075 4234,3075.81 2482,3084 2426,3085 2367,3086 1680,3087 1835,3090 2020,3104 2865,3120 2436,3134 1439,3149 2275,3156 2129,3157 3457,3158 3855,3171 1530,3174 4234,3179.19 2866,3181 2468,3186 3262,3189 3641,3190 1614,3192 1711,3193 2002,3201 2911,3207 3331,3215 1439,3229 3806,3235 3641,3248 1530,3254 2174,3261 3469,3264 3515,3264 1658,3265 2279,3266 3269,3266 4234,3282.57 2020,3290 1439,3309 1647,3319 1715,3319 1858,3319 2945,3324 3469,3326 3515,3326 2575,3328 2655,3328 2735,3328 1530,3334 2086,3348 2289,3352 2360,3363 2020,3370 3169,3374 3440,3379 3491,3379 3542,3379 4234,3385.95 1439,3389 2943,3392 3280,3394 3359,3398 2575,3408 2655,3408 2735,3408 2289,3423 2361,3424 3272,3461 3221,3462 3526,3464 3115,3467 1439,3469 3685,3479 2575,3488 2655,3488 2735,3488 4234,3489.33 1687,3491 2280,3495 1957,3504 2157,3508 2218.5,3515 3869,3533 3316,3547 3370,3547 3515,3549 3626,3549 3720.67,3549 1423,3551 3204,3556 2938,3566 1687,3571 3338,3585 3468,3588 3673.33,3588 3768,3588 4234,3592.71 3229,3597 3283,3597 2916,3602 2391,3628 2456,3628 2066,3630 2146,3630 2226,3630 2943,3636 1687,3651 3174,3662 2860,3664 3412,3674 3605,3675 3731,3675 3854,3687 1423,3690 4234,3696.09 2047,3704 3854,3752 2362,3775 2863,3777 2030,3779 3452,3780 2678,3785 2750,3785 3192,3785 3240.5,3785 3289,3785 2438,3793 1439,3794 2981,3796 4234,3799.48 2213,3800 2516,3801 2593,3802 2327,3803 3755,3811 3635,3819 3989,3830 2688,3842 2768,3842 3192,3845 3240.5,3845 3289,3845 2981,3846 3029,3846 2930,3847 3857,3850 1949,3856 2029,3856 3300,3888 3755,3897 3857,3897 1439,3898 3635,3899 4234,3902.86 1626,3910 1706,3910 1786,3910 1949,3936 3857,3942 2966,3955 3182,3959 3306,3967 2042,3968 3451,3968 3755,3971 3635,3979 1626,3990 1706,3990 1786,3990 2146,3994 4073,3995 2379,3998 2459,3998 2539,3998 2971,4001 1439,4002 4234,4006.24 3164,4030 2688,4044 2795,4045 4168,4058 1964,4075 2057,4076 2892,4086 3005.56,4086 3119.11,4086 3232.67,4086 3627,4086 3725,4086 3452,4092 1439,4106 1532,4106 1625,4106 4234,4109.62 2688,4125.5 2795,4125.5 2407,4133 2506,4133 3871,4179 1981,4199 2061,4199 2141,4199 2221,4199 2301,4199 2795,4206 2688,4207 1439,4210 1532,4210 1625,4210 4234,4213 2892,4235 3005.56,4235 3119.11,4235 3232.67,4235 3346.22,4235 3459.78,4235 3573.33,4235 3686.89,4235 3800.44,4235 3914,4235 4168,4235
LED_STA: D1.2 U1.26 | length 2234.7
  Top Layer w10: D1.2 2255,1668.51 2255,1800 2645,2190 v2(2861,2190) ; v2@2662,2974 2684.53,2996.53 U1.26
  Bottom Layer w10: v2@2661,2974 2661,2639 2861,2439 v2(2861,2190)
  other v2: 2663,2977
NetAT_1: AT.1 C10.2 L5.2 | length 332
  Top Layer w25: C10.2 1961.98,2338.02
  Top Layer w35: AT.1@1723,2344.75 L5.2@1997,2344.75
NetBUZ1_2: BUZ1.2 Q1.1 | length 92.9
  Top Layer w30: Q1.1 BUZ1.2@2547.07,4084.93
NetC6_2: C6.2 C7.2 L6.2 U1.13 | length 359.2
  Top Layer w10: C7.2@2232,3306 2313,3306 2330.42,3323.42 U1.13 ; C7.2@2232.24,3308.76 C6.2
  Top Layer w20: L6.2@2232.24,3230.24 C7.2
NetC11_1: C11.1 R10.2 U1.15 | length 418.4
  Top Layer w10: R10.2@2232,3116 2288,3116 2327,3155 2327,3264 2347,3284 U1.15@2442,3284 ; C11.1@2232.24,3040.76 R10.2
NetC12_2: C12.2 R11.2 U1.16 | length 361.4
  Top Layer w10: C12.2 R11.2@2387.24,3031.24 ; C12.2@2318,3032 2312,3038 2312,3083 2436.5,3207.5 U1.16
NetC13_2: C13.2 R12.2 U1.17 | length 252.4
  Top Layer w10: C13.2@2457,3032 2458,3031 2535,3031 2535,3093 2507.36,3120.64 U1.17
NetC15_1: C15.1 L1.1 U5.5 | length 142.8
  Top Layer w20: L1.1 U5.5@2452,2348.88
  Top Layer w25: C15.1 L1.1@2368.98,2345.98
NetC15_2: C15.2 L2.1 | length 59
  Top Layer w25: L2.1 C15.2@2264.83,2345.83
NetC16_2: C16.2 L2.2 L5.1 | length 124.9
  Top Layer w24: L5.1@2071.12,2346.17 L2.2@2130,2346.17
  Top Layer w25: C16.2 2099.98,2345.02
NetC18_1: C18.1 U4.3 | length 107
  Top Layer w10: U4.3 3712,3378 3724,3390 C18.1@3724,3428
NetC18_2: C18.2 R18.2 | length 94.3
  Top Layer w10: C18.2 3733.76,3490.24 R18.2@3793,3431
NetC19_1: C19.1 U4.8 | length 154.4
  Top Layer w20: U4.8 3882,3106 3911.25,3135.25 C19.1
NetC19_2: C19.2 D2.2 L3.2 U4.1 | length 164
  Top Layer w20: U4.1 3877,3326 3911.25,3291.75 C19.2
NetC21_2: C21.2 U2.4 | length 54.4
  Top Layer w10: U2.4 C21.2@3803.98,3989.02
NetC27_2: C27.2 R28.2 R29.1 U12.3 | length 210
  Top Layer w10: U12.3@3263.76,3428.76 3315.75,3428.76 3391,3428.76 R29.1@3391,3432 ; R29.1@3401.25,3428.76 R28.2@3480.76,3428.76
NetC41_2: C41.2 U13.4 | length 42.4
  Top Layer w10: U13.4 C41.2@3121.98,3766.98
NetD1_1: D1.1 R40.1 | length 102.2
  Top Layer w10: D1.1 R40.1@1975.08,1601
NetD4_1: D4.1 L4.2 POWER.1
  other v2: 3317,2608 3384,2609 3450,2609 3512,2610 3317,2682 3384,2682 3449,2682 3512,2683
NetD7_1: D7.1 R9.1 | length 99.2
  Top Layer w10: D7.1 R9.1@1605.08,1598
NetFAN_2: FAN.2 L4.1 | length 3923.9
  Top Layer w60: L4.1 v2(3547,2123) v2(3626.33,2123) v2(3705.67,2123) v2@3784,2123
  Bottom Layer w60: FAN.2 3758,4159 4172,3745 4172,2375 4115,2318 3980,2318 v2(3785,2123) v2(3705.67,2123) v2(3626.33,2123) v2@3549,2123
NetR1_1: R1.1 X1.3 | length 117
  Top Layer w10: X1.3@2047.99,3460 R1.1@2165,3460
NetR1_2: R1.2 U1.6 | length 202.5
  Top Layer w10: R1.2@2234,3461.21 U1.6
NetR2_2: R2.2 U1.60 | length 225.4
  Top Layer w10: R2.2@2555,3843 2555,3787 2586.1,3755.9 U1.60
NetR15_1: R15.1 U9.4 U9.6 U10.1 | length 539.3
  Top Layer w10: U9.4@1558.49,3419.51 U9.4 ; U10.1@1615.12,3288.88 R15.1
  Top Layer w20: U9.4@1558.49,3419.51 R15.1@1614,3364
  Bottom Layer w10: U9.6 1641,3655.49 1641,3548 U9.4@1563,3470
NetR19_2: R19.2 U4.6 | length 122.4
  Top Layer w10: R19.2@3660,3021 3687,3021 3712,3046 U4.6
NetR20_1: R20.1 R21.2 U4.4 | length 185.8
  Top Layer w10: R20.1@3566.76,3429.76 R21.2 ; R21.2@3648,3427 3648,3392 3662,3378 U4.4
NetR25_2: R25.2 R26.3 | length 172
  Top Layer w10: R26.3@3328,3116 R25.2@3500,3116
NetR26_1: R26.1 R27.1 | length 312
  Top Layer w10: R27.1@3075,3431 3075,3402 3157,3320 R26.1@3324,3320
NetR26_2: R26.2 U12.1 | length 393.6
  Top Layer w10: U12.1 3207,3377 3218,3366 3381,3366 3427,3320 R26.2@3427,3215
NetR28_1: R28.1 U11.3 U11.4 | length 571.6
  Top Layer w10: U11.3 3380.9,3602.1 R28.1@3486,3497
  Bottom Layer w30: U11.3@3380.9,3843.9 U11.4
NetR47_1: R47.1 RS485.1 U14.7 | length 170.9
  Top Layer w20: U14.7 RS485.1@3702.39,2638.39
NetR47_2: R47.2 RS485.2 U14.6 | length 190.6
  Top Layer w10: RS485.2@3810,2633 RS485.2@3814,2633
  Top Layer w20: U14.6@3753,2470 3753,2576 RS485.2@3810,2633
NetU1_5: U1.5 X1.1 | length 416.2
  Top Layer w10: X1.1@2051,3555 2271,3555 2345.1,3480.9 U1.5
NetU5_1: U5.1 X2.1 | length 110.3
  Top Layer w10: U5.1 2647,2311.71 X2.1@2647,2291
RS485_RE: U1.44 U14.2 U14.3 | length 1997.2
  Top Layer w10: U1.44 2963.1,3480.9 3178,3266 v2@3219,3266 ; v2(3182,2311) 3662,2311 3704,2269 U14.2@3704,2265 ; U14.2 U14.3@3749,2251
  Bottom Layer w10: v2@3174,2311 3181,2318 3181,2767 3219,2805 v2(3219,3265)
SHT_SCL: U1.3 U8.6 | length 425.4
  Top Layer w10: U8.6@2288,3838 2288,3791 2315,3764 2315,3563 2357.73,3520.27 U1.3
SHT_SDA: U1.2 U8.1 | length 408.1
  Top Layer w10: U8.1@2399,3843 2399,3721 2340,3662 2340,3567 2367.05,3539.95 U1.2
SW1: SW1.6 U1.27 | length 1819.2
  Top Layer w10: SW1.6 2359,1818 2694,2153 v2@2901,2153 ; 2687,2938 2694,2938 2704.21,2948.21 U1.27
  Bottom Layer w10: v2@2697,2935 2697,2650 2899,2448 v2(2899,2154)
  other v2: 2697,2936
SW2: SW1.5 U1.29 | length 1796.6
  Top Layer w10: SW1.5 2459,1856 2721,2118 v2@2941,2118 ; v2@2731,2886 2731,2973 2743.58,2985.58 U1.29
  Bottom Layer w10: v2@2731,2882 2731,2665 2937,2459 v2(2937,2119)
  other v2: 2730,2882
SW3: SW1.4 U1.30 | length 1782.4
  Top Layer w10: SW1.4 2559,1907 2734,2082 v2@2974,2082 ; v2@2763.27,2923 U1.30
  Bottom Layer w10: v2(2764,2923) 2764,2683 2975,2472 v2(2975,2082)
SWCLK: DLOAD.3 U1.49 | length 309.9
  Top Layer w10: U1.49 2802.64,3771.64 2893,3862 DLOAD.3@2893,3903
SWDIO: DLOAD.4 U1.46 | length 946.9
  Top Layer w10: DLOAD.4@2860,3973 2924,4037 3090,4037 3142,3985 3142,3901 2975,3734 2975,3552 2943.27,3520.27 U1.46
USART1_RX: U1.43 U14.1 | length 1889.2
  Top Layer w10: U1.43 2954.79,3461.21 3178,3238 ; v2(3144,2253) 3647,2253 U14.1@3648,2252
  Bottom Layer w10: v2@3141,2255 3144,2258 3144,2779 3184,2819 v2(3184,3225)
USART1_TX: U1.42 U14.4 | length 2023
  Top Layer w10: U1.42 2945.47,3441.53 3146,3241 v2@3146,3195 ; v2(3110,2357) 3749,2357 3804,2302 U14.4@3804,2252
  Bottom Layer w10: v2@3110,2358 3110,2789 3151,2830 3151,3190 v2(3147,3194)
VTEST: R30.2 U6.2 U7.1 | length 543.2
  Top Layer w10: R30.2@1613,3129 U6.2 1682.73,2954 U7.1@2022,2954
pads on no net: DLOAD.2 U1.1 U1.4 U1.7 U1.8 U1.9 U1.10 U1.11 U1.14 U1.20 U1.21 U1.22 U1.23 U1.24 U1.25 U1.28 U1.35 U1.36 U1.37 U1.38 U1.39 U1.40 U1.41 U1.45 U1.50 U1.51 U1.52 U1.53 U1.54 U1.55 U1.56 U1.57 U1.59 U1.61 U1.62 U4.2 U8.3 U8.4
copper on no net:
  other v4: 4027,2100 1777,4147 4035,4147

## Polygon pours and split planes (outlines as drawn)
DGND on Bottom Layer "GND_L02_P-001" (solid, remove dead copper, pour order 10): 1403,4267 1403,1436 2738,1436 2738,1978 4256,1978 4256,4267
DGND on Top Layer "GND_L02_P-001" (solid, remove dead copper, pour order 12): 4256,4267 1403,4267 1403,1436 2739,1436 2738,1436 2738,1978 4256,1978 4256,4267

## Keep-outs
Keep-Out Layer:
  circle w10: c4027,2103 r97.62
  circle w10: c4036,4146 r97.62
  circle w10: c1779,4147 r97.62

## Other copper
Top Layer:
  rectangle net DGND: 3156,3758 3311,3825
  rectangle net NetD4_1: 3283,2469 3368,2565
  rectangle net NetD4_1: 3285,2705 3379,2874
  rectangle net NetC19_2: 3812,3285 3898,3367
  region net NetD4_1: 3549,2559 3549,2723 3284,2723 3284,2559
  rectangle net A5V0: 4013,3547 4196,3949
  rectangle net NetC19_2: 3844,3284 4109,3507
  rectangle net NetC19_2: 3958,3107 4110,3289
  pour cut-out: 2164,2373 2183,2373 2183,2319 2164,2319
  pour cut-out: 2025,2373 2044,2373 2044,2319 2025,2319
  pour cut-out: 2272,2308 2272,2325 2361,2325 2361,2308
  pour cut-out: 1235.5,2603 1235.5,1961 1947,1961 1947,2603
Bottom Layer:
  rectangle net NetD4_1: 3289,2559 3722,2723
  pour cut-out: 1235.5,2603 1235.5,1961 1947,1961 1947,2603

## Silkscreen, mask and mechanical layers (free items; w line width, h text height)
Top Overlay:
  text "KSHINE" at 1476,3854 h200
  text "RC_V2.03_180518" at 2076,2593 h60
Mechanical 1:
  lines w10: 2743,1973 2743,1431 1398,1431 1398,2115 1398,4272 4261,4272 4261,1973 2744,1973

## Dimensions
1352,4272 to 1297,1432 on Top Overlay
1397,4330 to 4260,4358 on Top Overlay

## Text inside footprints (layer, text, board x,y; h text height)
POWER: Bottom Overlay "+" at 3635.67,2705.46 h60 r270
RS485: Top Overlay "+" at 3566,2727 h60 r270
U11: Bottom Overlay "C" at 3463.02,3875.57 h30; Bottom Overlay "D" at 3462.52,3939.12 h30